# Altium PCB PCB2.PcbDoc
Units mil, origin at the board's own origin, x right, y up, seen from the top; angles counter-clockwise.
Board outline 1889.76 x 2244.09 mil, 2 copper layers (Top Layer, Bottom Layer); 3 components, 7 nets, 55 pads, 0 vias.
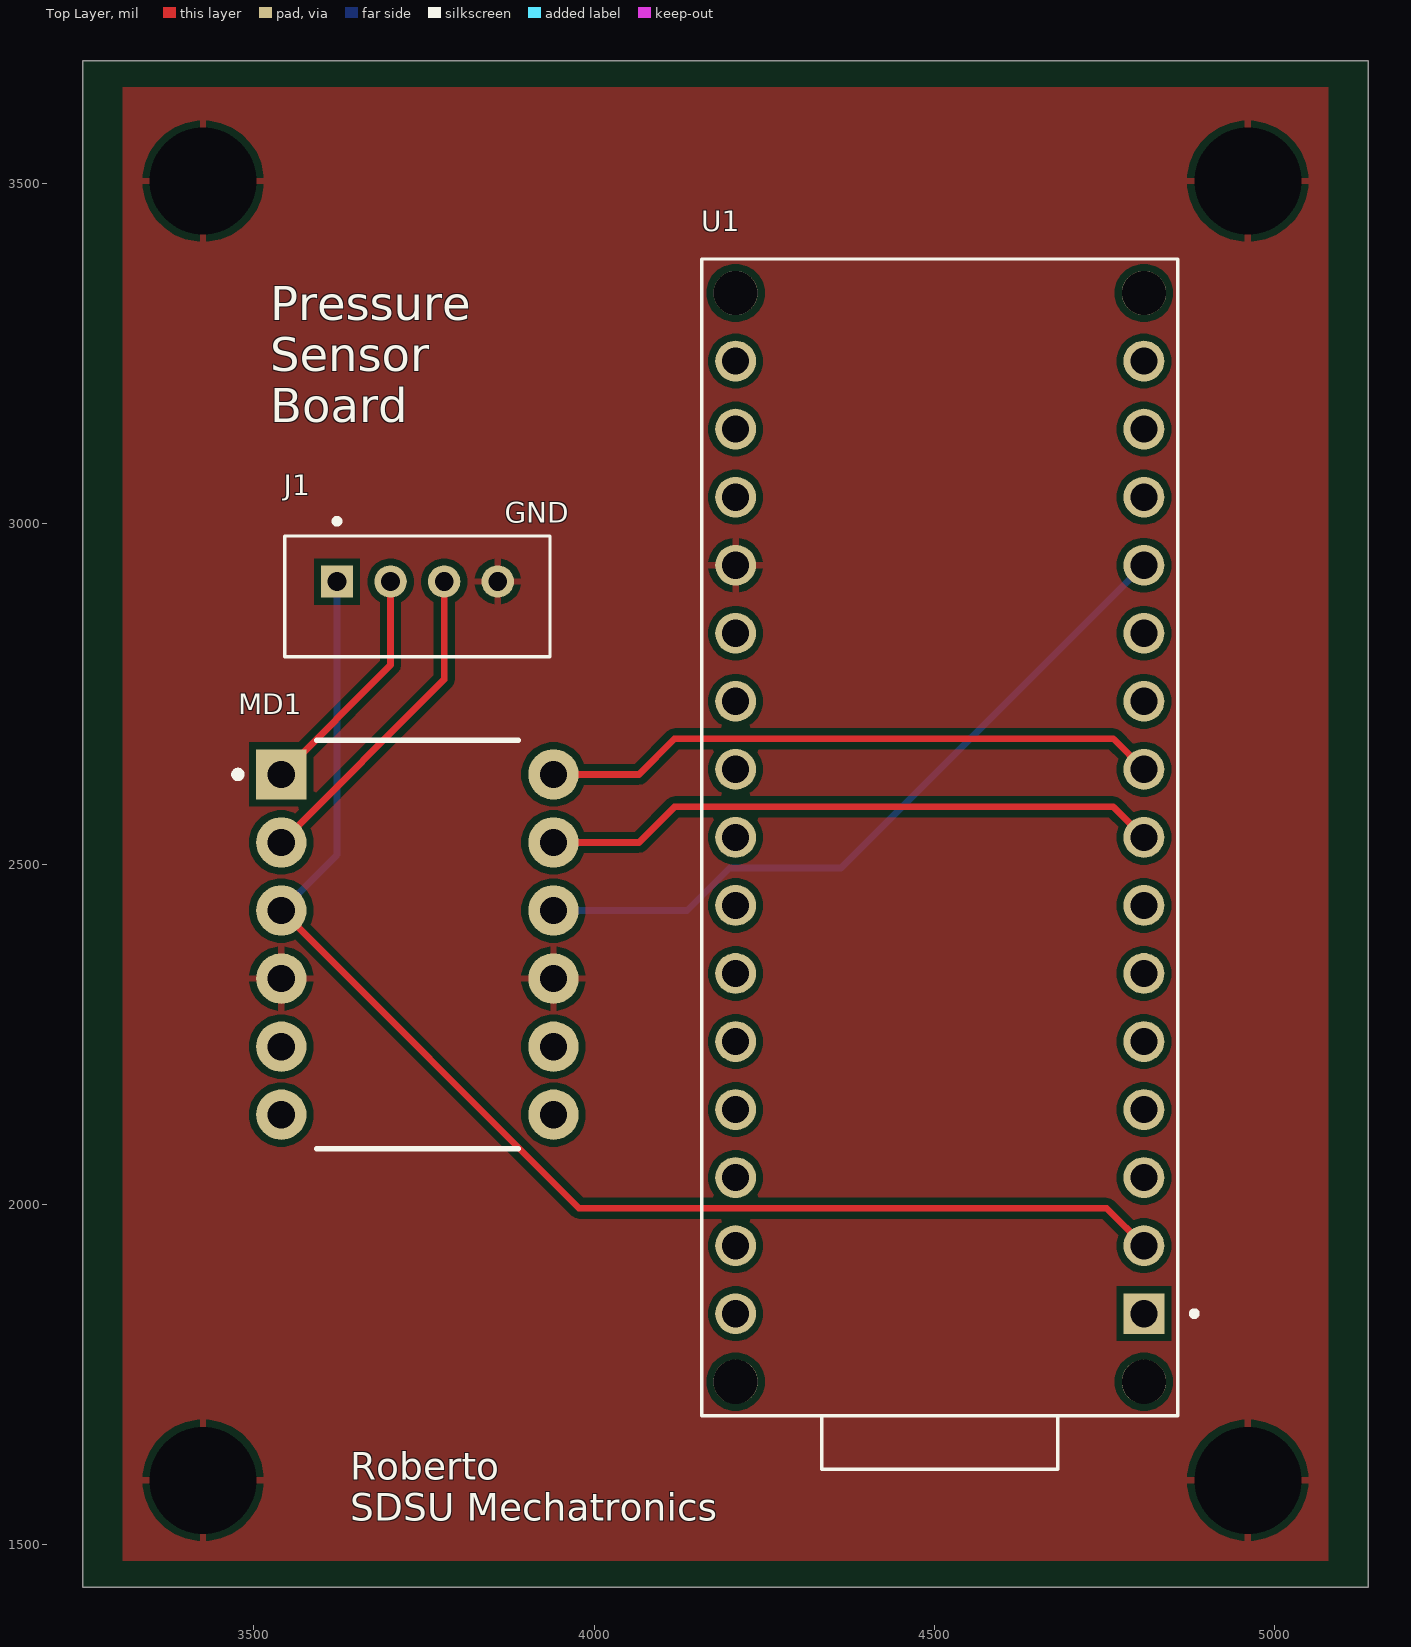
[diagram p0: Top Layer view]
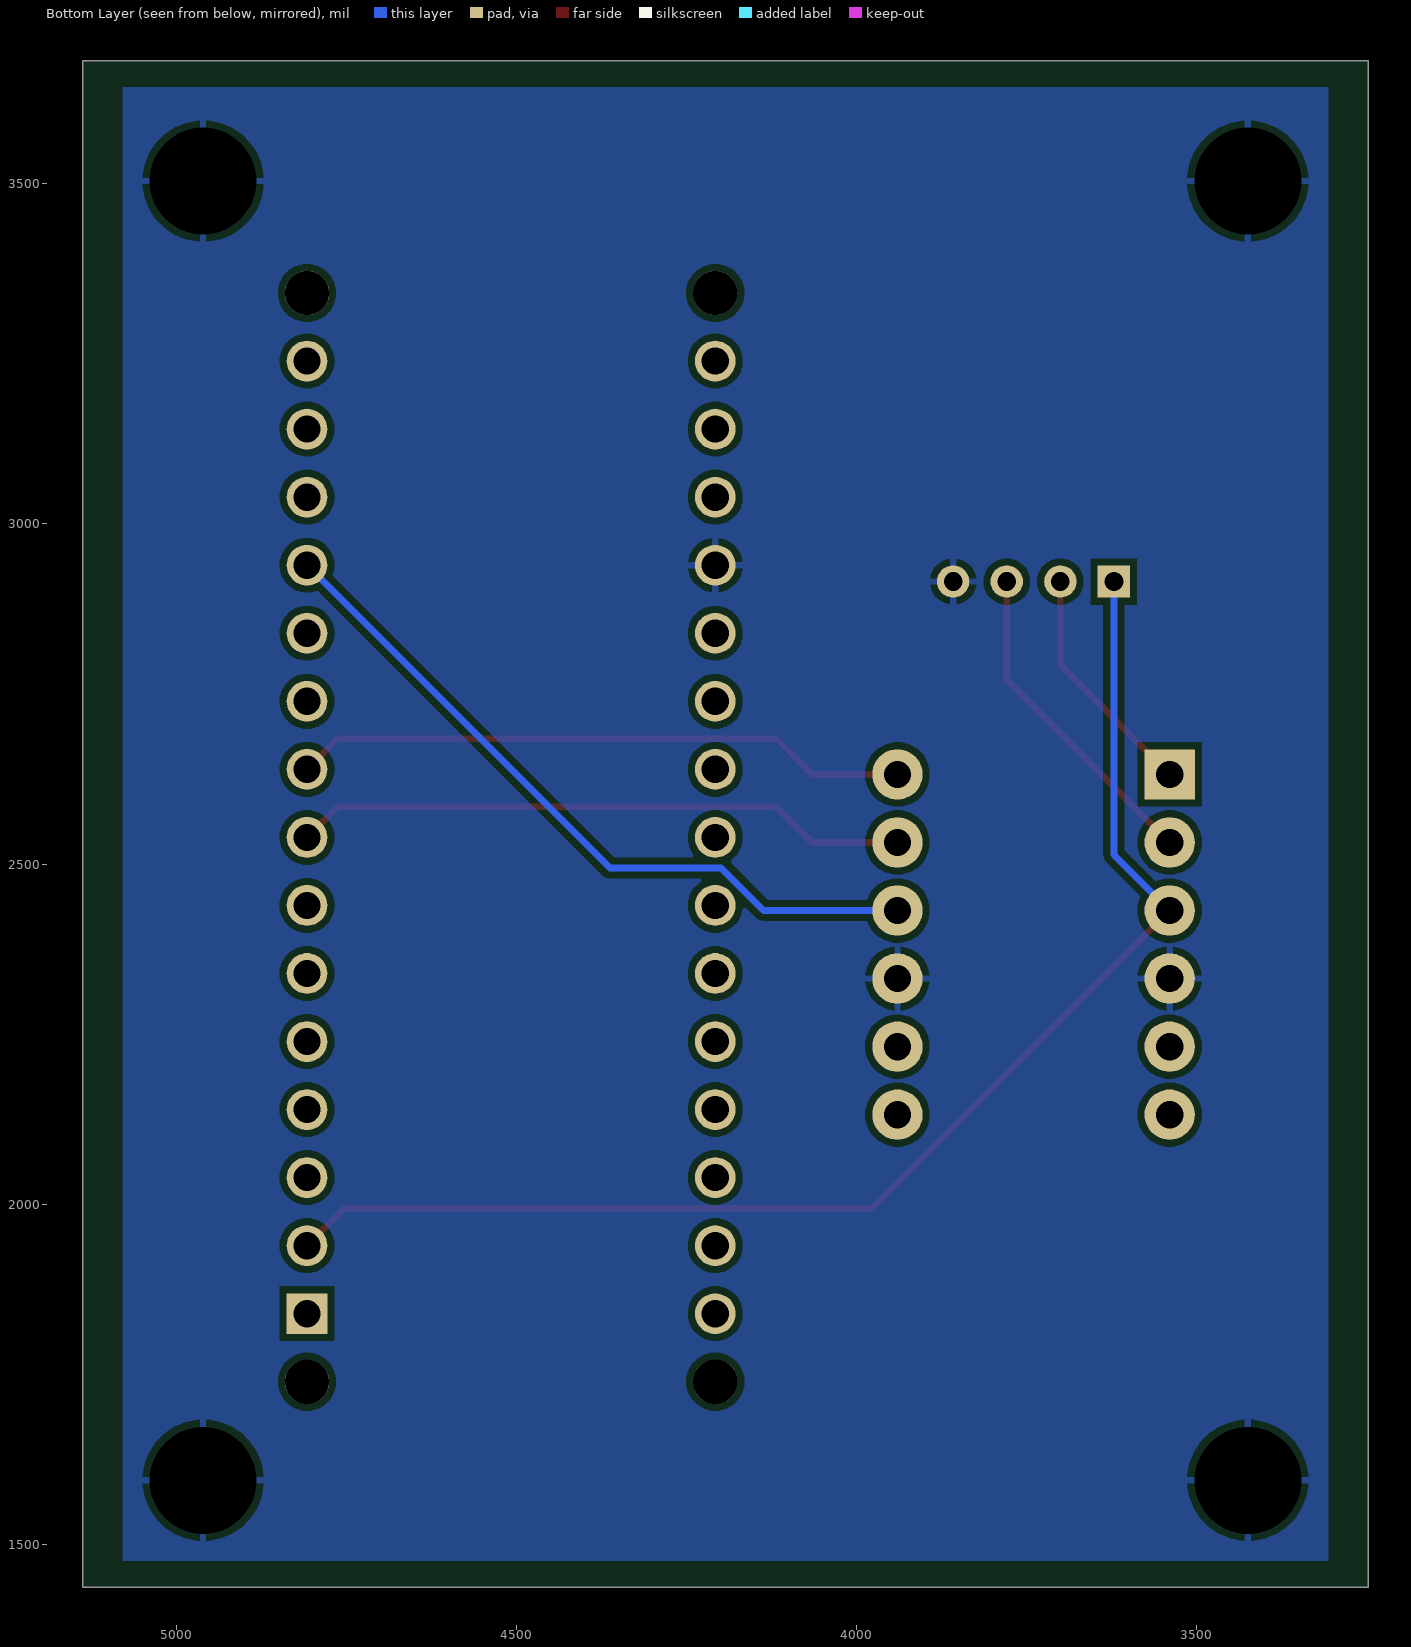
[diagram p1: Bottom Layer view, seen from below]

## Layer stack, top to bottom
Top Solder: solder mask 0.4, Solder Resist, Dk 3.5
Top Layer: signal copper 1.4
Dielectric 1: dielectric 12.6, FR-4, Dk 4.8
Bottom Layer: signal copper 1.4
Bottom Solder: solder mask 0.4, Solder Resist, Dk 3.5

## Board outline
3248.03,1437.01 5137.8,1437.01 5137.8,3681.1 3248.03,3681.1

## Design rules (kind name [scope] priority, off if disabled: settings)
Clearance Clearance_1 [All] p1: gap=10 ignorepadtopadclearanceinfootprint=FALSE except(0: Arc-Hole Track-Hole SMDPad-Hole THPad-Hole Via-Hole Fill-Hole Poly-Hole Region-Hole Text-Hole)
Clearance [All] p2: gap=10 ignorepadtopadclearanceinfootprint=FALSE except(0: Arc-Hole Track-Hole SMDPad-Hole THPad-Hole Via-Hole Fill-Hole Poly-Hole Region-Hole Text-Hole)
HoleSize [All] p1: absolutevalues=TRUE maxlimit=275.59 minlimit=10 maxpercent=80.000 minpercent=20.000
PolygonConnect [All] p1: connectstyle=Relief reliefconductorwidth=10 reliefentries=4 polygonreliefangle="90 Angle" airgapwidth=10
RoutingVias [All] p1: holewidth=28 width=50 viastyle="Through Hole" minholewidth=28 minwidth=50 maxholewidth=28 maxwidth=50
SolderMaskExpansion [All] p1: expansion=4 istentingtop=FALSE
Width [All] p1: maxlimit=10 minlimit=10 preferedwidth=10
29 further rules are at their usual default settings.

## Components (designator, comment, footprint, x,y, rotation, side; value= is the part's Value field where it differs from the comment)
J1 "B4B-PH-K-S(LF)(SN)" JST_B4B-PH-K-S(LF)(SN) 3740.16,2893.7 r180 top
MD1 "BOB-12009" FP-BOB-12009-MFG 3740.16,2381.89 r0 top
U1 "ABX00053" MODULE_ABX00053 4507.87,2539.37 r90 top

## Footprints (in the part's own frame and the unit in brackets; to place one, negate y for a bottom-side part, rotate by r counter-clockwise, add the part's x,y. Pads: shape width x height; smd on the part's side, far side on the other; paste and mask are expansions set on the pad)
FP-BOB-12009-MFG [mm]
  rect 1.88x1.88 hole 1.02 paste-1000 mask+0: 1(-5.08,6.35)
  round 1.88 hole 1.02 paste-1000 mask+0: 2(-5.08,3.81) 3(-5.08,1.27) 4(-5.08,-1.27) 5(-5.08,-3.81) 6(-5.08,-6.35) 7(5.08,-6.35) 8(5.08,-3.81) 9(5.08,-1.27) 10(5.08,1.27) 11(5.08,3.81) 12(5.08,6.35)
  silkscreen extent -6.82,-7.62 3.76,7.62, body extent -6.45,-7.72 6.45,7.72, height 0.25
JST_B4B-PH-K-S(LF)(SN) [mm]
  rect 1.208x1.208 hole 0.7: 1(3,-0.55)
  round 1.208 hole 0.7: 2(1,-0.55) 3(-1,-0.55) 4(-3,-0.55)
  silkscreen extent -4.95,-2.9 4.95,2.25
MODULE_ABX00053 [mil]
  rect 60x60 hole 40: 1(-700,-300)
  round 60 hole 40: 2(-600,-300) 3(-500,-300) 4(-400,-300) 5(-300,-300) 6(-200,-300) 7(-100,-300) 8(0,-300) 9(100,-300) 10(200,-300) 11(300,-300) 12(400,-300) 13(500,-300) 14(600,-300) 15(700,-300) 16(700,300) 17(600,300) 18(500,300) 19(400,300) 20(300,300) 21(200,300) 22(100,300) 23(0,300) 24(-100,300) 25(-200,300) 26(-300,300) 27(-400,300) 28(-500,300) 29(-600,300) 30(-700,300)
  round 64.96 hole 64.96 unplated: ""(-800,-300) ""(-800,300) ""(800,-300) ""(800,300)
  silkscreen extent -929,-378 850,350, body extent -905,-350 850,350, height 315

## Part data
J1: "PH Series 4 Position 2 mm Pitch Through Hole Crimp Top Entry Shrouded Header", Package=None, Availability=Unavailable, MP=B4B-PH-K-S(LF)(SN), Price=None
MD1: library part CMP-157458-000001-1, "LOGIC LEVEL CONVERTER - BI-DIREC", Logic Function=Translator
U1: "ARDUINO NANO RP2040 CONNECT WITH", Package=None, Availability="In Stock", Check_prices=https://www.snapeda.com/parts/ABX00053/Arduino/view-part/6098734/?ref=eda, MF=Arduino, MP=ABX00053, Price=None, SnapEDA_Link=https://www.snapeda.com/parts/ABX00053/Arduino/view-part/6098734/?ref=snap

## Free pads (board coordinates)
  round 60 on Drill Guide: 1(4822.83,3464.57)
  round 0 hole 157.48: 2(3425.2,1594.49) 2(3425.2,3503.94) 2(4960.63,1594.49) 2(4960.63,3503.94)

## Nets (pads, with @x,y where several pads share a name; then routed paths per layer and width w, separated by ;. In a path a pad name is that pad's centre, name@x,y a point inside that pad or via, vN(x,y) a via of type N, cw(c..) or ccw(c..) an arc to the next point about the centre after c; other vN are vias at no path point)
GND: J1.4 MD1.4 MD1.9 pad.2 U1.19
NetJ1_1: J1.1 MD1.3 U1.2 | length 1989.1
  Top Layer w10: MD1.3 3977.68,1994.37 4752.87,1994.37 U1.2
  Bottom Layer w10: MD1.3 3622.05,2513.78 J1.1
NetJ1_2: J1.2 MD1.1 | length 350
  Top Layer w10: MD1.1 3700.79,2792.52 J1.2
NetJ1_3: J1.3 MD1.2 | length 482.6
  Top Layer w10: MD1.2 3779.53,2771.26 J1.3
NetMD1_10: MD1.10 U1.12 | length 1077.9
  Bottom Layer w10: MD1.10 4136.75,2431.89 4199.23,2494.37 4362.87,2494.37 U1.12
NetMD1_11: MD1.11 U1.8 | length 908.1
  Top Layer w10: MD1.11 4065.76,2531.89 4118.24,2584.37 4762.87,2584.37 U1.8
NetMD1_12: MD1.12 U1.9 | length 908.1
  Top Layer w10: MD1.12 4065.76,2631.89 4118.24,2684.37 4762.87,2684.37 U1.9
pads on no net: MD1.5 MD1.6 MD1.7 MD1.8 U1. U1.1 U1.3 U1.4 U1.5 U1.6 U1.7 U1.10 U1.11 U1.13 U1.14 U1.15 U1.16 U1.17 U1.18 U1.20 U1.21 U1.22 U1.23 U1.24 U1.25 U1.26 U1.27 U1.28 U1.29 U1.30

## Polygon pours and split planes (outlines as drawn)
GND on Bottom Layer "Bottom GND" (solid, pour order 1): 3307.09,1476.38 5078.74,1476.38 5078.74,3641.73 3307.09,3641.73
GND on Top Layer "Bottom GND" (solid, pour order 0): 3307.09,3641.73 3307.09,1476.38 5078.74,1476.38 5078.74,3641.73

## Silkscreen, mask and mechanical layers (free items; w line width, h text height)
Top Overlay:
  text "Pressure  / Sensor / Board" at 3523.62,3149.61 h50
  text "GND" at 3868.27,3002.13 h30
  text "Roberto / SDSU Mechatronics" at 3641.73,1535.43 h40
Mechanical 1:
  the board outline again, w0